# Altium PCB 转接板 (4).PcbDoc
Units mm, origin at the board's own origin, x right, y up, seen from the top; angles counter-clockwise.
Board outline 68.33 x 61.47 mm, 2 copper layers (Top Layer, Bottom Layer); 15 components, 23 nets, 130 pads, 11 vias.
Unrouted connection lines stored in the file: 2.
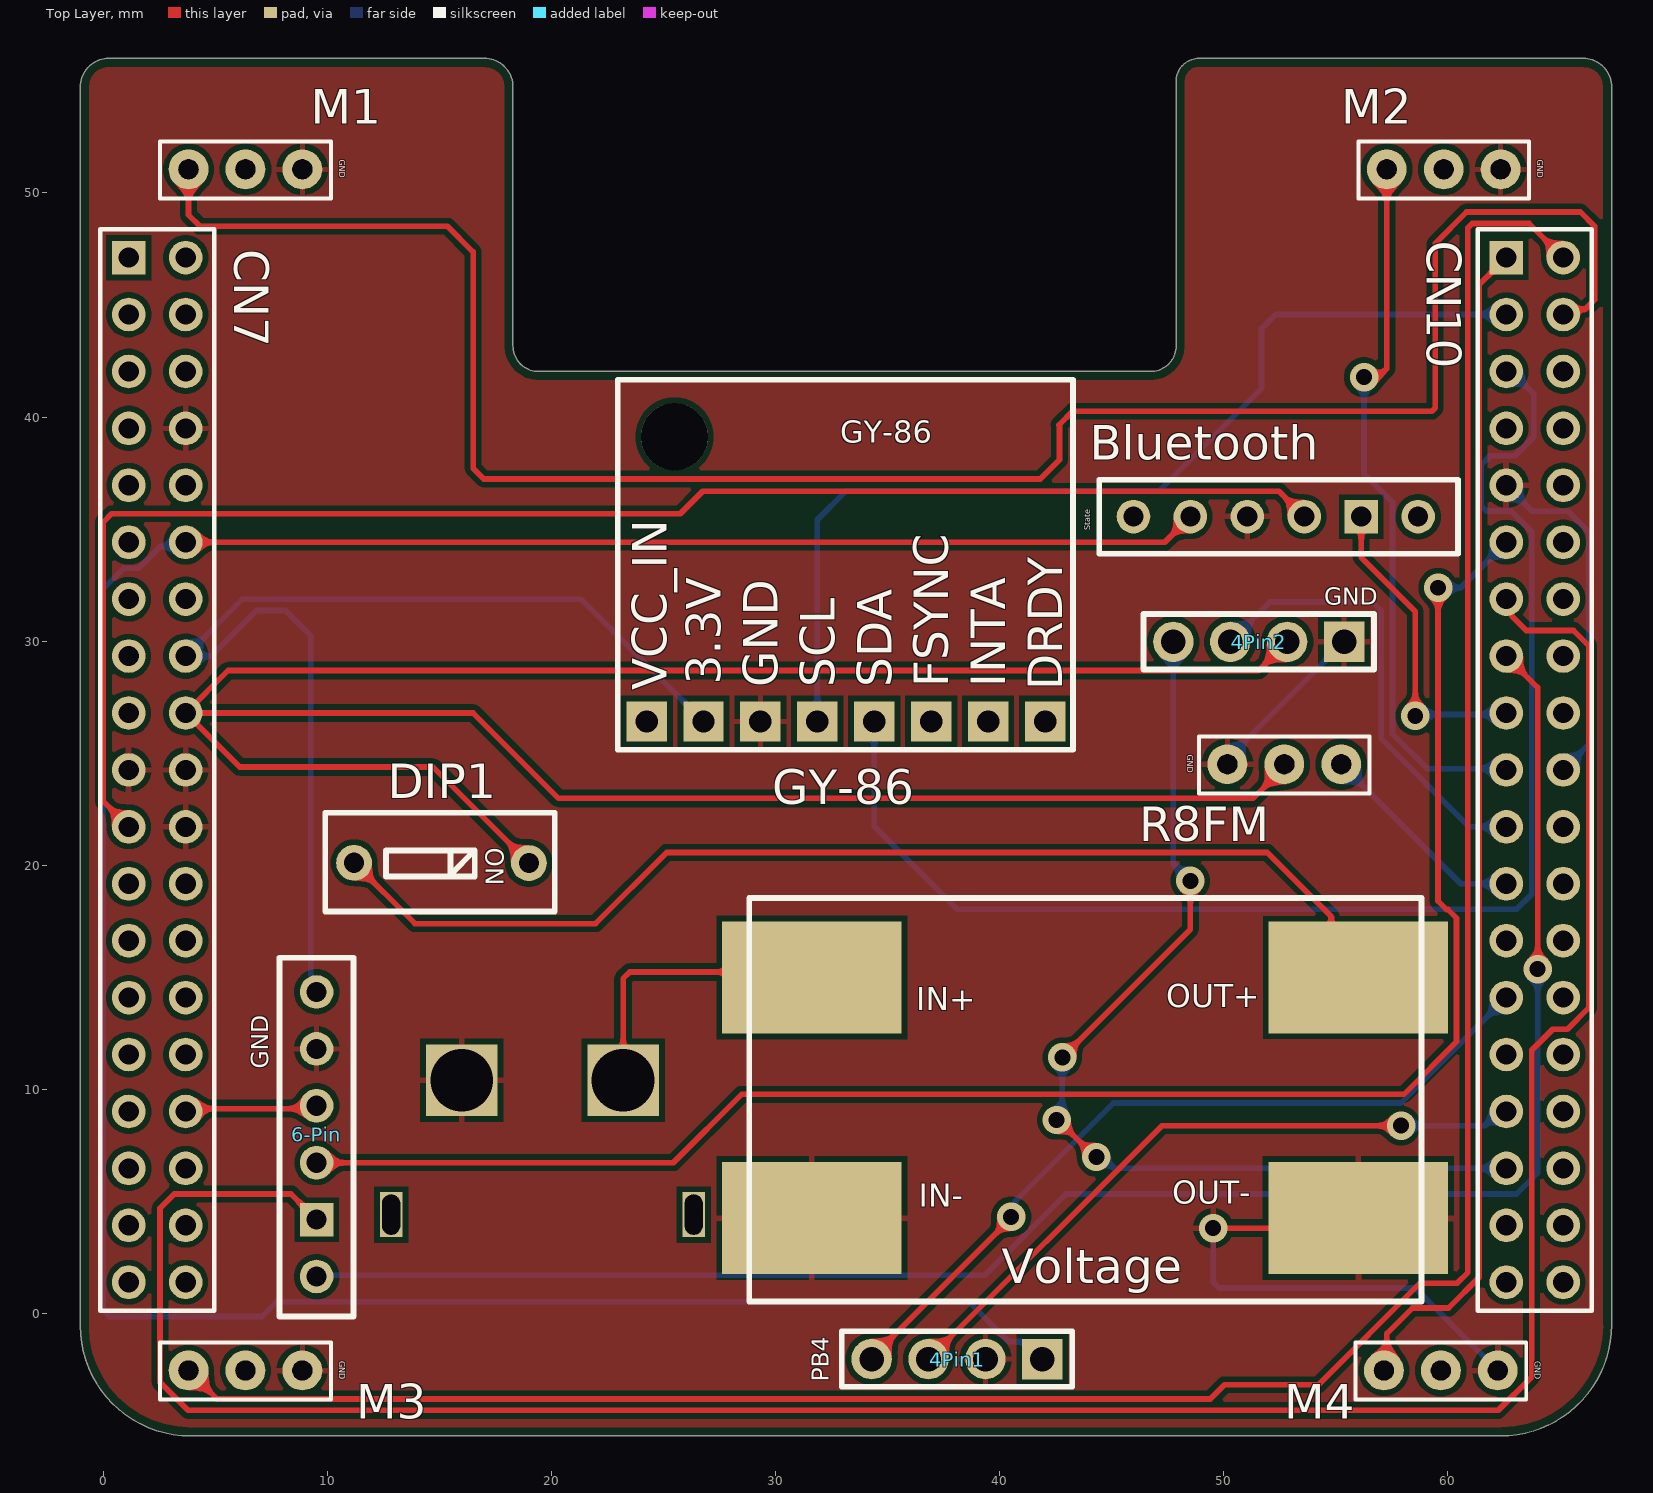
[diagram p0: Top Layer view]
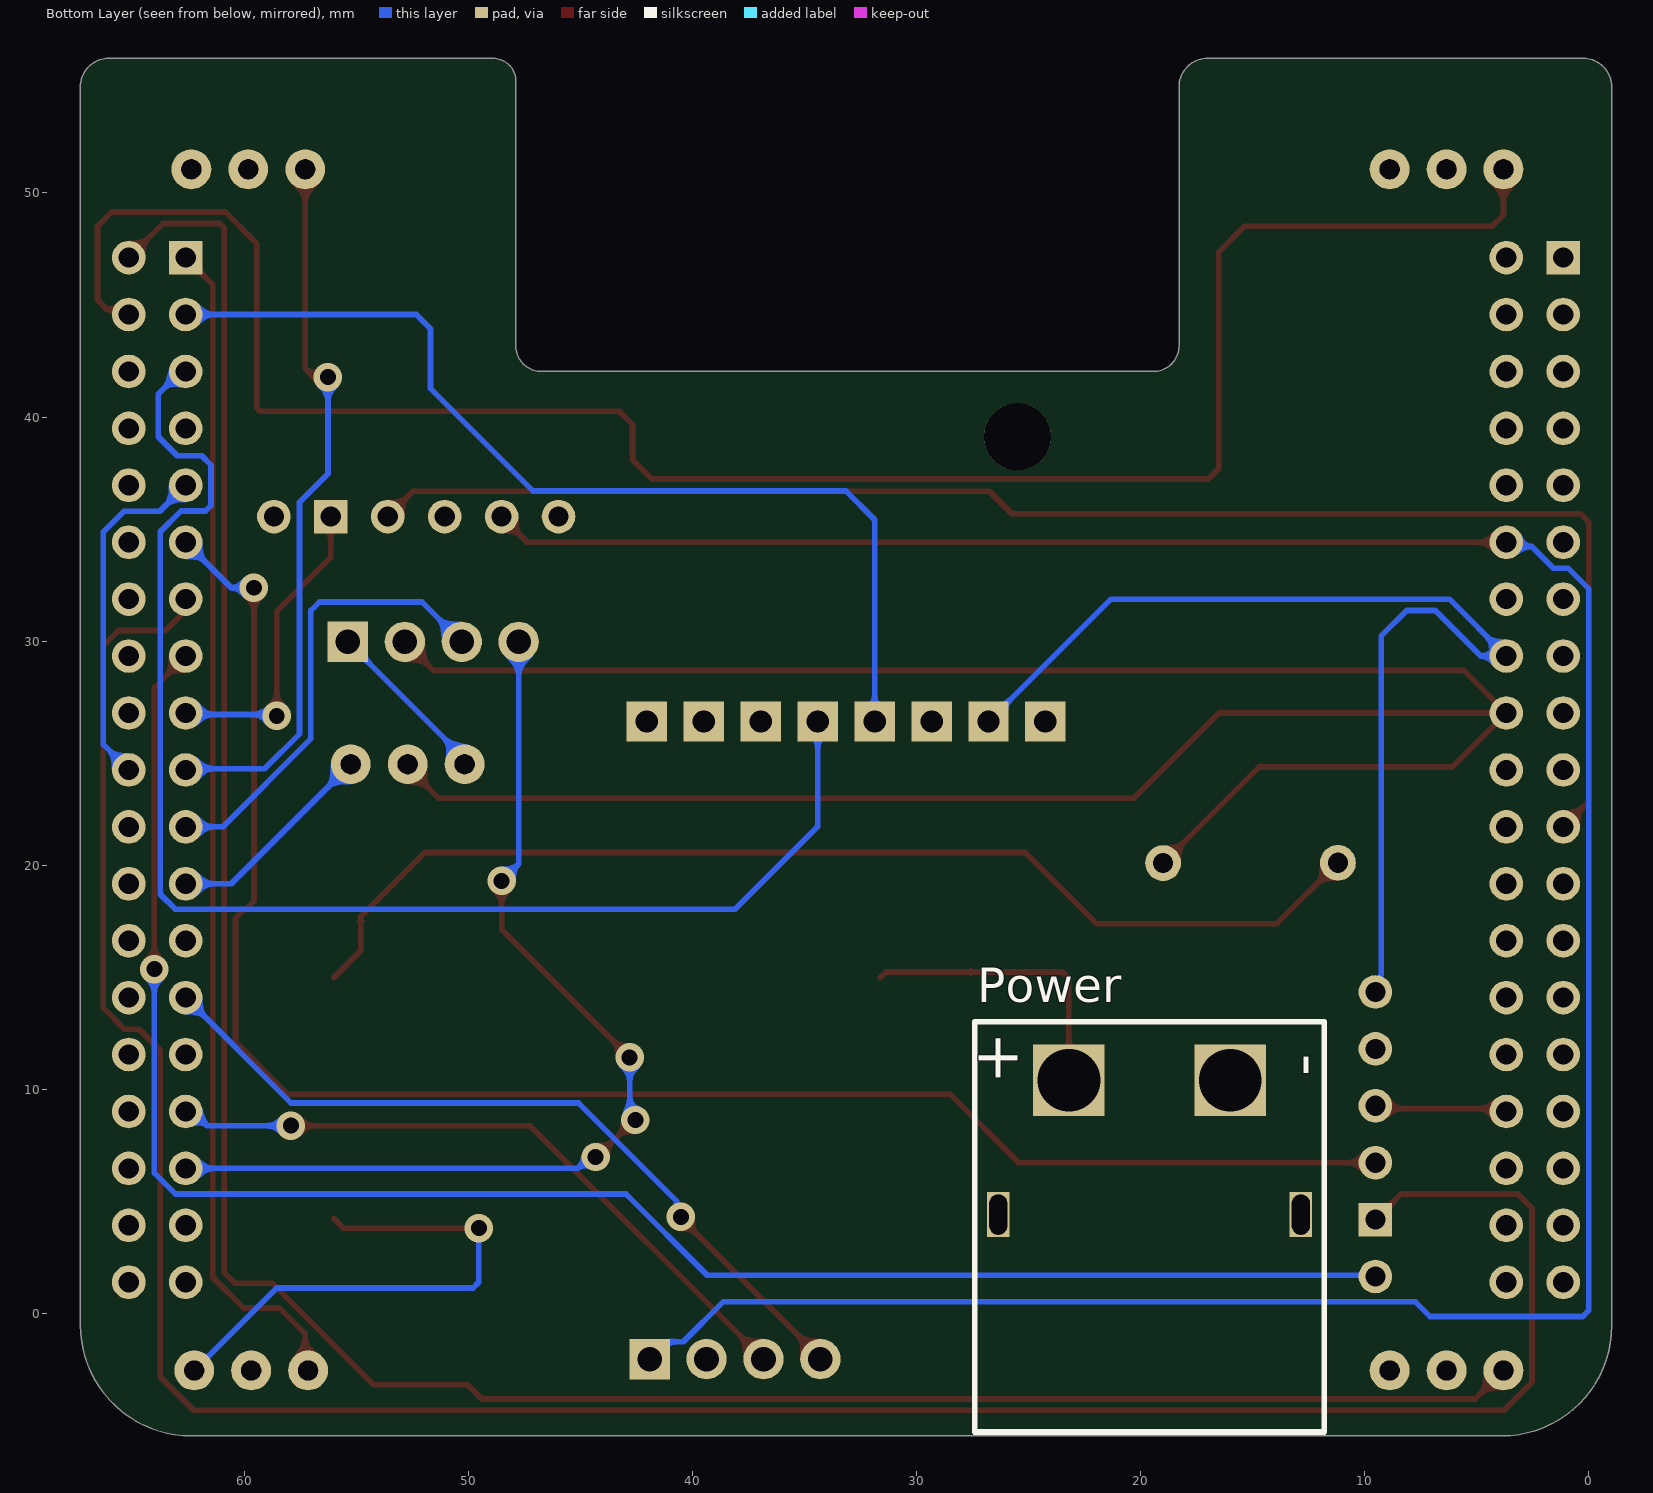
[diagram p1: Bottom Layer view, seen from below]

## Layer stack, top to bottom
Top Solder: solder mask 0.0102, Solder Resist, Dk 3.5
Top Layer: signal copper 0.0356
Dielectric 1: dielectric 0.32, FR-4, Dk 4.8
Bottom Layer: signal copper 0.0356
Bottom Solder: solder mask 0.0102, Solder Resist, Dk 3.5

## Board outline
-1.016,-0.548 ccw(c3.897,-0.548) 3.897,-5.461 62.357,-5.461 ccw(c62.357,-0.508) 67.31,-0.508 67.31,54.737 ccw(c66.04,54.737) 66.04,56.007 48.895,56.007 ccw(c48.895,54.991) 47.879,54.991 47.879,43.18 cw(c46.736,43.18) 46.736,42.037 19.431,42.037 cw(c19.431,43.18) 18.288,43.18 18.288,54.737 ccw(c17.018,54.737) 17.018,56.007 0.254,56.007 ccw(c0.254,54.737) -1.016,54.737

## Design rules (kind name [scope] priority, off if disabled: settings)
Clearance [All] p1: gap=0.254 ignorepadtopadclearanceinfootprint=FALSE except(0: Arc-Hole Track-Hole SMDPad-Hole THPad-Hole Via-Hole Fill-Hole Poly-Hole Region-Hole Text-Hole)
HoleSize [All] p1: absolutevalues=TRUE maxlimit=3.048 minlimit=0.025 maxpercent=80.000 minpercent=20.000
MinimumSolderMaskSliver [All] p1: minsoldermaskwidth=0.051
PolygonConnect [All] p1: connectstyle=Relief reliefconductorwidth=0.254 reliefentries=4 polygonreliefangle="90 Angle" airgapwidth=0.254
RoutingVias [All] p1: holewidth=0.711 width=1.27 viastyle="Through Hole" minholewidth=0.711 minwidth=1.27 maxholewidth=0.711 maxwidth=1.27
SilkToSilkClearance [All] p1: silktosilkclearance=0
SilkToSolderMaskClearance [IsPad] p1: minsilkscreentomaskgap=0 clearancetoexposedcopper=TRUE
SolderMaskExpansion [All] p1: expansion=0.102 istentingtop=FALSE
Width [All] p1: maxlimit=0.254 minlimit=0.254 preferedwidth=0.254
26 further rules are at their usual default settings.

## Components (designator, comment, footprint, x,y, rotation, side; value= is the part's Value field where it differs from the comment)
4Pin1 "4-Pin" PCBComponent_1 38.037,-1.937 r180 top
4Pin2 "4-Pin" PCBComponent_1 51.498,30.067 r180 top
6-Pin "6-Pin" bluetooth 9.525,7.874 r270 top
Bluetooth "Bluetooth" bluetooth 52.451,35.56 r0 top
CN7 "CN7" "Header 19X2" 2.567,24.484 r270 top
CN10 "CN10" "Header 19X2" 64.035,24.484 r270 top
DIP1 "" SW 14.605,19.939 r270 top
GY-86 "GY-86" GY-86 32.639,34.798 r0 top
M1 "M" Motor 47.968,56.959 r180 top
M2 "M" Motor 101.435,56.959 r180 top
M3 "M" Motor 47.968,3.365 r180 top
M4 "M" Motor 101.308,3.365 r180 top
Power "Power" Power 20.281,3.683 r0 bottom
R8FM "R8FM" R8FM 53.429,24.701 r180 top
Voltage "*" "DC-DC mini" 43.053,10.05 r0 top

## Footprints (in the part's own frame and the unit in brackets; to place one, negate y for a bottom-side part, rotate by r counter-clockwise, add the part's x,y. Pads: shape width x height; smd on the part's side, far side on the other; paste and mask are expansions set on the pad)
bluetooth [mm]
  round 1.5 hole 0.9 paste+0 mask+0.102: 1(-6.477,0) 2(-3.937,0) 3(-1.397,0) 4(1.143,0) 6(6.223,0)
  rect 1.5x1.5 hole 0.9 paste+0 mask+0.102: 5(3.683,0)
  silkscreen extent -8,-1.65 8,1.65
"DC-DC mini" [mm]
  rect 8x5 smd paste+0 mask+0.102: 1(-11.43,4.936) 2(-11.43,-5.796) 3(12.954,-5.796) 4(12.954,4.936)
  silkscreen extent -14.22,-9.51 15.78,8.49
GY-86 [mm]
  rect 1.8x1.8 hole 1 paste+0 mask+0.051: 1(-8.382,-8.382) 2(-5.852,-8.382) 3(-3.312,-8.382) 4(-0.772,-8.382) 5(1.768,-8.382) 6(4.308,-8.382) 7(6.848,-8.382) 8(9.398,-8.382)
  round 3 hole 3 unplated paste+0: ""(-7.145,4.325)
  silkscreen extent -9.68,-9.65 10.64,6.86
"Header 19X2" [mm]
  rect 1.5x1.5 hole 0.9 paste+0 mask+0.051: 1(-22.633,-1.424)
  round 1.5 hole 0.9 paste+0 mask+0.051: 2(-22.633,1.116) 3(-20.093,-1.424) 4(-20.093,1.116) 5(-17.553,-1.424) 6(-17.553,1.116) 7(-15.013,-1.424) 8(-15.013,1.116) 9(-12.473,-1.424) 10(-12.473,1.116) 11(-9.933,-1.424) 12(-9.933,1.116) 13(-7.393,-1.424) 14(-7.393,1.116) 15(-4.853,-1.424) 16(-4.853,1.116) 17(-2.313,-1.424) 18(-2.313,1.116) 19(0.227,-1.424) 20(0.227,1.116) 21(2.767,-1.424) 22(2.767,1.116) 23(5.307,-1.424) 24(5.307,1.116) 25(7.847,-1.424) 26(7.847,1.116) 27(10.387,-1.424) 28(10.387,1.116) 29(12.927,-1.424) 30(12.927,1.116) 31(15.467,-1.424) 32(15.467,1.116) 33(18.007,-1.424) 34(18.007,1.116) 35(20.547,-1.424) 36(20.547,1.116) 37(23.087,-1.424) 38(23.087,1.116)
  silkscreen extent -23.9,-2.69 24.36,2.39
Motor [mil]
  round 70 hole 35 slot 35.2 at 0 deg paste+0 mask+2: 1(1538.5,232.5) 2(1638.5,232.5) 3(1738.5,232.5)
  silkscreen extent 1488,184 1788,284
PCBComponent_1 [mm]
  rect 1.8x1.8 hole 1.1 paste+0.102 mask+0.102: 1(-3.873,0.095)
  round 1.8 hole 1.1 paste+0.102 mask+0.102: 2(-1.333,0.095) 3(1.206,0.095) 4(3.746,0.095)
  silkscreen extent -5.21,-1.14 5.08,1.33
Power [mm]
  rect 3.2x3.2 hole 2.8 paste+0 mask+0.102: 1(-4.279,-6.731) 2(2.921,-6.731)
  rect 1x2 hole 0.8 slot 1.8 at 90 deg paste+0 mask+0.051: 3(-7.429,-0.731)
  rect 1x2 hole 0.8 slot 1.8 at 90 deg paste+0 mask+0.102: 4(6.071,-0.731)
  silkscreen extent -8.48,-9.33 7.12,8.97
R8FM [mil]
  round 70 hole 35 slot 35.2 at 0 deg paste+0 mask+2: 1(-71.5,7.5) 2(28.5,7.5) 3(128.5,7.5)
  silkscreen extent -122,-42 178,59
SW [mm]
  round 1.6 hole 0.9 paste+0 mask+0.051: 1(-0.173,-3.409) 2(-0.163,4.391)
  silkscreen extent -2.41,-4.7 2,5.54

## Part data
6-Pin: library part Bluetooth
DIP1: library part "拨码开关 2.54*1"
Voltage: library part Component_1

## Via types
v1: diameter 1.27, hole 0.711, Top Layer to Bottom Layer, 11 vias

## Nets (pads, with @x,y where several pads share a name; then routed paths per layer and width w, separated by ;. In a path a pad name is that pad's centre, name@x,y a point inside that pad or via, vN(x,y) a via of type N, cw(c..) or ccw(c..) an arc to the next point about the centre after c; other vN are vias at no path point)
3V3_1: 4Pin1.1 Bluetooth.2 CN7.12 | length 125.4
  Top Layer w0.254: CN7.12 47.371,34.417 Bluetooth.2
  Bottom Layer w0.254: CN7.12 3.493,34.227 2.552,34.227 1.587,33.262 0.929,33.262 0.012,32.345 0.012,0.137 0.276,-0.127 7.088,-0.127 7.735,0.52 38.63,0.52 40.409,-1.259 41.137,-1.259 4Pin1.1
3V3_2: 6-Pin.1 CN7.16 GY-86.2 | length 49.3
  Bottom Layer w0.254: 6-Pin.1 9.287,14.589 9.287,15.107 9.271,15.123 9.271,30.226 8.128,31.369 6.858,31.369 4.826,29.337 CN7.16 6.223,31.877 21.326,31.877 GY-86.2
5V_1: 4Pin2.2 CN7.18 DIP1.2 R8FM.2 | length 120.2
  Top Layer w0.254: DIP1.2 14.714,24.384 6.096,24.384 CN7.18 ; R8FM.2 52.705,24.384 51.308,22.987 20.32,22.987 16.51,26.797 CN7.18 ; 4Pin2.2 51.551,28.691 5.577,28.691 CN7.18
  Bottom Layer w0.254: CN7.18 CN7.18@3.683,27.126
5V_2: DIP1.1 Voltage.4 | length 50.5
  Top Layer w0.254: DIP1.1 13.909,17.399 21.971,17.399 25.146,20.574 51.943,20.574 54.799,17.718 54.799,16.194 Voltage.4
11.1V_1: Power.2 Voltage.1 | length 13.2
  Top Layer w0.254: Power.2 23.202,14.947 23.495,15.24 31.369,15.24 Voltage.1
GND: 4Pin1.2 4Pin2.1 6-Pin.2 Bluetooth.3 CN7.8 CN7.19 CN7.20 CN7.22 CN10.9 CN10.20 GY-86.3 M1.1 M2.1 M3.1 M4.1 Power.1 R8FM.3 Voltage.2 Voltage.3 | length 46.9
  Top Layer w0.254: v1(49.53,3.81) 55.562,3.81 Voltage.3
  Bottom Layer w0.254: CN7.22 CN7.22@3.858,21.892 ; v1(49.53,3.81) 49.53,1.397 49.784,1.143 58.547,1.143 M4.1 ; R8FM.3 50.165,24.765 4Pin2.1 ; CN10.9 63.766,35.802 65.365,35.802 66.282,34.885 66.282,25.388 CN10.20
PA4: 6-Pin.3 CN7.32 | length 5.9
  Top Layer w0.254: CN7.32 3.81,9.144 9.398,9.144 6-Pin.3
PA5: 6-Pin.4 CN10.11 | length 77.9
  Top Layer w0.254: 6-Pin.4 25.442,6.731 28.49,9.779 58.039,9.779 60.388,12.128 60.388,17.644 60.005,18.027 59.946,18.027 59.563,18.411 v1(59.563,32.385) v1@59.563,32.639
  Bottom Layer w0.254: v1(59.563,32.385) 60.579,32.385 CN10.11
PA6: 6-Pin.5 CN10.13 | length 116.7
  Top Layer w0.254: 6-Pin.5 8.382,5.334 3.175,5.334 2.54,4.699 2.54,-3.066 3.792,-4.318 62.248,-4.318 63.742,-2.824 63.742,11.747 64.683,12.688 65.341,12.688 66.282,13.629 66.282,29.805 65.607,30.48 63.5,30.48 62.849,31.131 62.849,31.639 CN10.13
PA7: 6-Pin.6 CN10.15 | length 79.4
  Top Layer w0.254: CN10.15 64.008,27.94 v1(64.008,15.367)
  Bottom Layer w0.254: 6-Pin.6 9.584,1.71 39.342,1.71 42.966,5.334 63.067,5.334 64.008,6.275 64.008,14.732
PA8: CN10.23 R8FM.1 | length 9.6
  Bottom Layer w0.254: R8FM.1 60.579,19.177 CN10.23
PA9: 4Pin2.3 CN10.21 | length 20.6
  Bottom Layer w0.254: 4Pin2.3 52.07,31.75 56.642,31.75 57.023,31.369 57.023,25.654 60.96,21.717 CN10.21
PA10: 4Pin2.4 CN10.33 | length 44.8
  Top Layer w0.254: v1(42.545,8.636) 42.608,8.636 44.259,6.985 v1(44.323,6.985) ; v1(42.799,11.43) 48.514,17.145 v1(48.514,19.304)
  Bottom Layer w0.254: v1@42.672,8.89 42.799,9.017 v1(42.799,11.43) ; v1(44.323,6.985) 44.598,6.985 45.106,6.477 CN10.33 ; 4Pin2.4 47.752,20.066 v1(48.514,19.304)
PB3: 4Pin1.3 CN10.31 | length 30.4
  Top Layer w0.254: 4Pin1.3 47.244,8.382 v1(57.912,8.382)
  Bottom Layer w0.254: v1(57.912,8.382) 61.647,8.382 62.282,9.017 CN10.31
PB4: 4Pin1.4 CN10.27 | length 35.4
  Top Layer w0.254: 4Pin1.4 34.29,-1.968 40.513,4.254 v1(40.513,4.318)
  Bottom Layer w0.254: v1(40.513,4.318) 40.707,4.512 40.707,5.02 45.085,9.398 57.912,9.398 CN10.27
PB6: Bluetooth.5 CN10.17 | length 14
  Top Layer w0.254: Bluetooth.5 56.134,33.739 58.547,31.326 v1(58.547,26.67)
  Bottom Layer w0.254: v1(58.547,26.67) 58.61,26.733 62.547,26.733 CN10.17
PB7: Bluetooth.4 CN7.21 | length 69
  Top Layer w0.254: CN7.21@1.48,21.717 CN7.21 0.012,22.848 0.012,35.318 0.381,35.687 25.751,35.687 26.755,36.691 52.463,36.691 Bluetooth.4
PB8: CN10.3 GY-86.4 | length 45.1
  Bottom Layer w0.254: GY-86.4 31.867,35.423 33.147,36.703 47.117,36.703 51.689,41.275 51.689,43.942 52.324,44.577 CN10.3
PB9: CN10.5 GY-86.5 | length 63
  Bottom Layer w0.254: GY-86.5 34.407,21.727 38.088,18.046 63.079,18.046 63.742,18.709 63.742,34.885 62.813,35.814 61.722,35.814 61.48,36.056 61.48,37.858 61.897,38.275 62.988,38.275 63.838,39.124 63.838,41.031 62.831,42.037 CN10.5
PC6: CN10.4 M1.3 | length 90.7
  Top Layer w0.254: M1.3 3.81,49.022 4.318,48.514 15.367,48.514 16.51,47.371 16.51,37.719 16.987,37.242 41.814,37.242 42.672,38.1 42.672,39.624 42.65,39.646 43.263,40.259 59.287,40.259 59.436,40.408 59.436,47.752 60.833,49.149 65.913,49.149 66.548,48.514 66.548,45.234 66.13,44.815 65.389,44.815 CN10.4
PC7: CN10.19 M2.3 | length 32.3
  Top Layer w0.254: v1(56.261,41.783) 56.896,41.783 57.277,42.164 M2.3
  Bottom Layer w0.254: v1(56.261,41.783) 56.261,37.472 57.531,36.202 57.531,25.864 59.079,24.316 62.552,24.316 CN10.19
PC8: CN10.2 M3.3 | length 111.5
  Top Layer w0.254: M3.3 5.08,-3.81 49.403,-3.81 50.038,-3.175 54.229,-3.175 58.76,1.356 60.419,1.356 60.896,1.834 60.896,48.45 61.087,48.641 63.627,48.641 CN10.2
PC9: CN10.1 M4.3 | length 52.9
  Top Layer w0.254: M4.3 57.28,-2.41 57.28,-0.888 58.417,0.249 60.03,0.249 61.404,1.623 61.404,45.91 CN10.1
pads on no net: Bluetooth.1 Bluetooth.6 CN7.1 CN7.2 CN7.3 CN7.4 CN7.5 CN7.6 CN7.7 CN7.9 CN7.10 CN7.11 CN7.13 CN7.14 CN7.15 CN7.17 CN7.23 CN7.24 CN7.25 CN7.26 CN7.27 CN7.28 CN7.29 CN7.30 CN7.31 CN7.33 CN7.34 CN7.35 CN7.36 CN7.37 CN7.38 CN10.6 CN10.7 CN10.8 CN10.10 CN10.12 CN10.14 CN10.16 CN10.18 CN10.22 CN10.24 CN10.25 CN10.26 CN10.28 CN10.29 CN10.30 CN10.32 CN10.34 CN10.35 CN10.36 CN10.37 CN10.38 GY-86. GY-86.1 GY-86.6 GY-86.7 GY-86.8 M1.2 M2.2 M3.2 M4.2 Power.3 Power.4

## Polygon pours and split planes (outlines as drawn)
GND on Top Layer "GND_L01_P000" (solid, remove dead copper, pour order 0): -1.143,57.785 67.564,57.785 71.12,54.229 70.485,53.594 70.485,-7.366 70.612,-7.493 70.358,-7.747 -3.048,-7.747 -3.048,57.531 -2.413,58.166

## Silkscreen, mask and mechanical layers (free items; w line width, h text height)
Top Overlay:
  text "GND" at 54.483,31.623 h0.76
  text "GND" at 7.366,10.922 h0.76 r90
  text "PB4" at 32.385,-3.048 h0.76 r90
Mechanical 1:
  lines w0.254: -1.016,-0.548 ccw(c3.897,-0.548) 3.897,-5.461 62.357,-5.461 ccw(c62.357,-0.508) 67.31,-0.508 67.31,49.022 67.31,54.737 ccw(c66.04,54.737) 66.04,56.007 58.674,56.007 49.276,56.007 48.895,56.007 ccw(c48.895,54.991) 47.879,54.991 47.879,43.434 47.879,43.18 cw(c46.736,43.18) 46.736,42.037 46.355,42.037 19.431,42.037 cw(c19.431,43.18) 18.288,43.18 18.288,54.737 ccw(c17.018,54.737) 17.018,56.007 0.254,56.007 ccw(c0.254,54.737) -1.016,54.737 -1.016,48.895 -1.016,-0.548

## Text inside footprints (layer, text, board x,y; h text height)
Bluetooth: Top Overlay "State" at 44.044,34.95 h0.25 r90
DIP1: Top Overlay "ON" at 17.071,20.775 h0.8 r270
GY-86: Top Overlay "3.3V" at 27.559,28.067 h1.52 r90; Top Overlay "GND" at 30.099,27.94 h1.52 r90; Top Overlay "SCL" at 32.639,27.94 h1.52 r90; Top Overlay "SDA" at 35.179,27.94 h1.52 r90; Top Overlay "FSYNC" at 37.719,27.94 h1.52 r90; Top Overlay "INTA" at 40.259,27.94 h1.52 r90; Top Overlay "DRDY" at 42.799,27.813 h1.52 r90; Top Overlay "VCC_IN" at 25.146,27.813 h1.52 r90
M1: Top Overlay "GND" at 10.528,51.473 h0.25 r270
M2: Top Overlay "GND" at 63.995,51.473 h0.25 r270
M3: Top Overlay "GND" at 10.528,-2.121 h0.25 r270
M4: Top Overlay "GND" at 63.868,-2.121 h0.25 r270
Power: Bottom Overlay "-" at 13.36,11.591 h2.03 r90; Bottom Overlay "+" at 25.48,10.236 h2.03 r270
R8FM: Top Overlay "GND" at 48.374,24.93 h0.25 r270
Voltage: Top Overlay "OUT-" at 47.701,4.902 h1.03; Top Overlay "IN-" at 36.398,4.775 h1.03; Top Overlay "IN+" at 36.271,13.538 h1.03; Top Overlay "OUT+" at 47.447,13.665 h1.03